# EAGLE board Schematic_Sensing_Module (EAGLE 9.6.2)
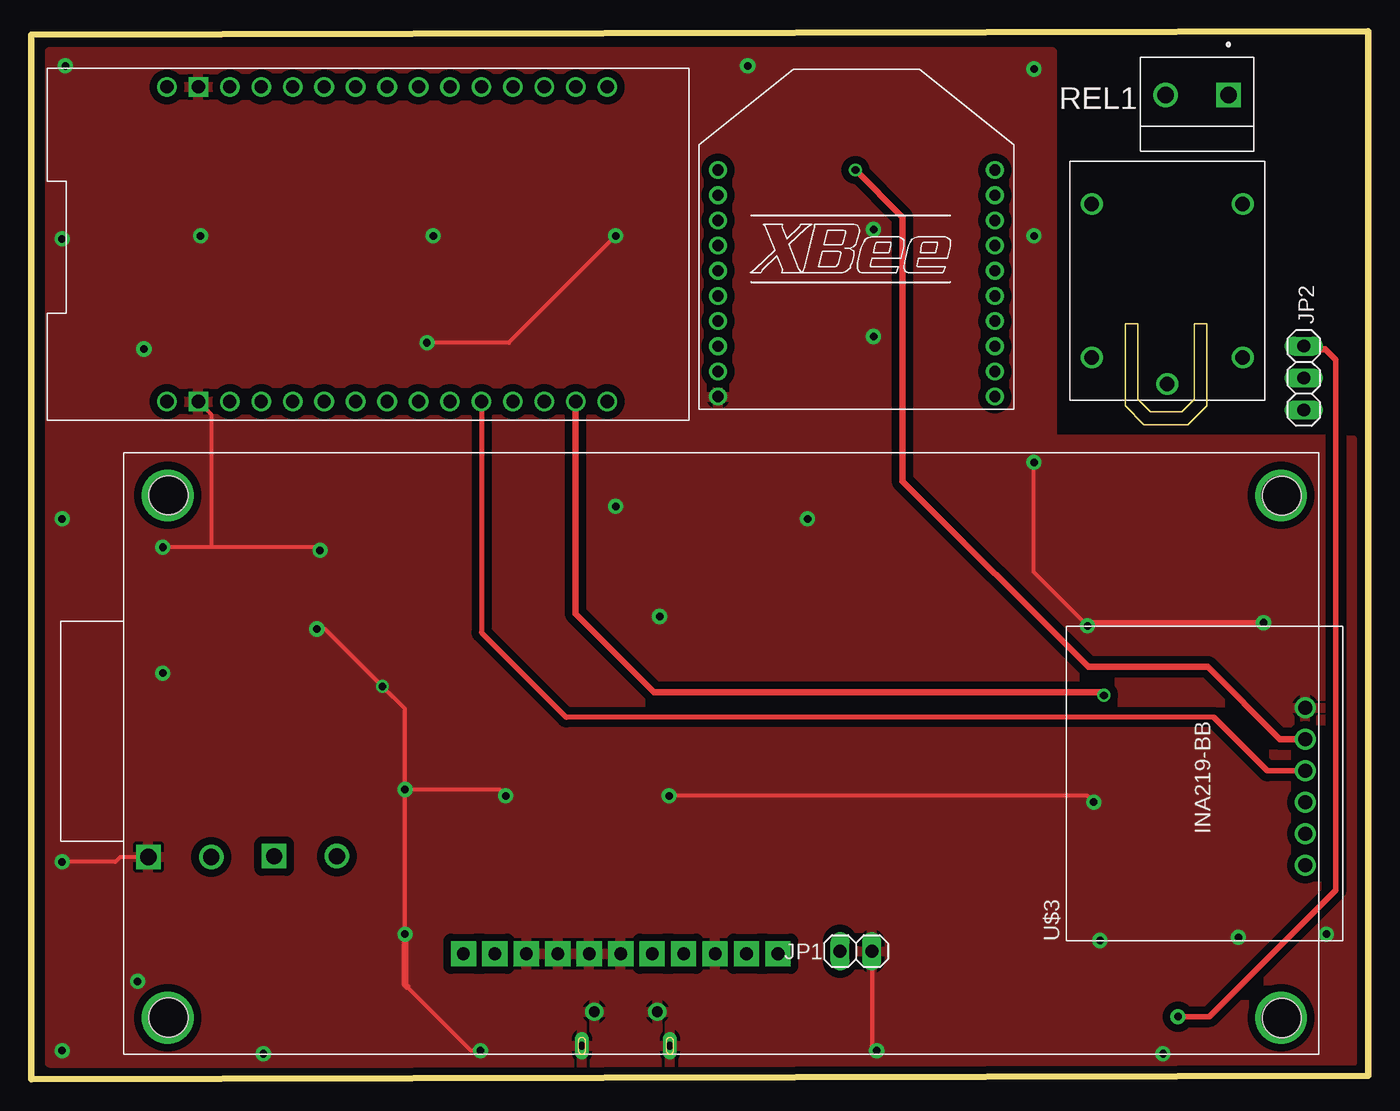
[diagram p0: board, top side]
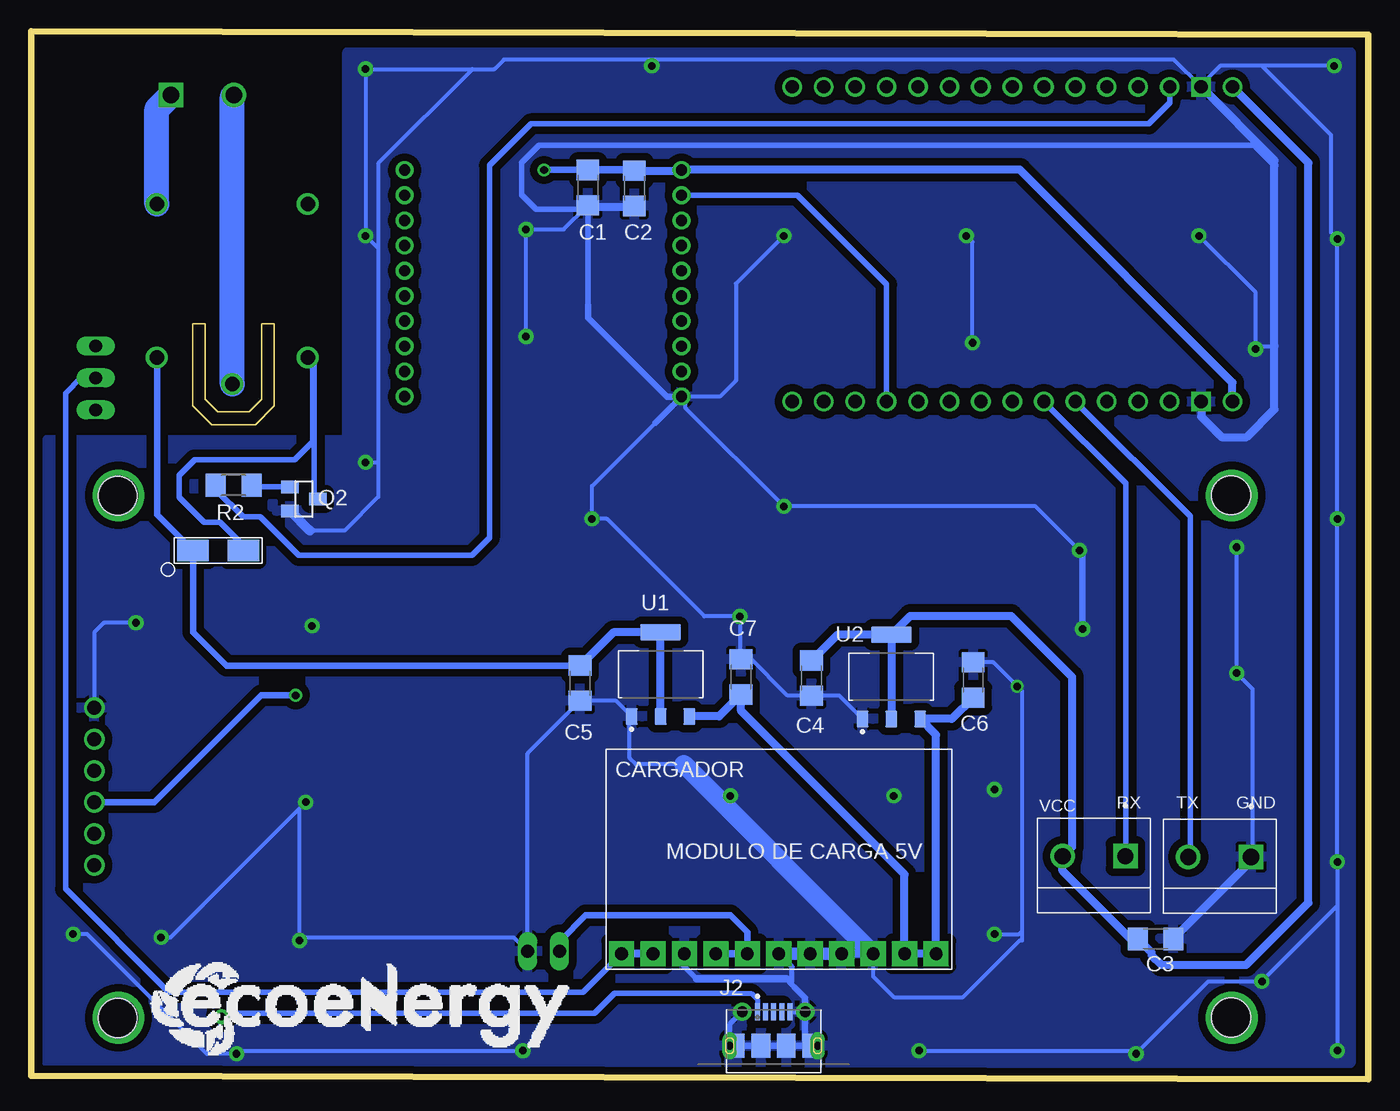
[diagram p1: board, bottom side, seen from below]

Size 106.25 x 83.25 mm. Coordinates in mm from the lower left corner, seen from the top.
Outline: 0,83 0,0 106.25,0.25 106.25,83.25 0,83
Copper layers (1*16): Top 0.035mm / dielectric 1.5mm / Bottom 0.035mm
Design rules "default *": minimum track width 0.3mm, minimum drill 0.6mm, track to track 0.6mm, track to pad 0.6mm, pad to pad 0.6mm, via to via 0.6mm, smd to smd 0.6mm, copper to edge 0.6mm, drill to drill 0.8mm, minimum pad ring 10mil, minimum via ring 8mil, stop-mask expansion 10mil, vias tented up to drill 0mil, thermal gap 10mil
Holes 3.1 mm at 10.9,46.4 10.9,4.9 99.4,4.85 99.4,46.35
Milling: 12 lines

## Footprints (pad centres in the part's own frame; a part is rotated, then mirrored left to right if it is on the bottom)
SMA = smd 2.5 x 1.7: 1 -2,0; 2 2,0
C1206 = smd 1.6 x 1.8: 1 -1.4,0; 2 1.4,0
MODULO_CARGA_5V = drill 1 pad 2 square: BAT -5,-7.5; BAT1 -2.5,-7.5; GND -7.5,-7.5; GND1 0,-7.5; GND2 2.5,-7.5; GND3 5,-7.5; GND4 7.5,-7.5; VIN -12.5,-7.5; VIN1 -10,-7.5; VOUT 10,-7.5; VOUT1 12.5,-7.5
TERMINAL-TB2 = drill 1.3 square: 1 -2.5,0 | drill 1.3: 2 2.5,0
MOLEX_1050170001 = smd 0.4 x 1.35: 1 -1.3,2.35; 2 -0.65,2.35; 3 0,2.35; 4 0.65,2.35; 5 1.3,2.35 | drill 0.85 pad 1.45: SH1 -2.5,2.35; SH2 2.5,2.35 | drill 0.6 pad 0.95 long: SH3 -3.5,-0.35; SH8 3.5,-0.35 | smd 1.2 x 1.9: SH4 -2.9,-0.35; SH7 2.9,-0.35 | smd 1.5 x 1.9: SH5 -1,-0.35; SH6 1,-0.35
1X02 = drill 1.016 long: 1 -1.27,0; 2 1.27,0
1X03 = drill 1.016 long: 1 -2.54,0; 2 0,0; 3 2.54,0
SOT23 = smd 1 x 1.4: 1 -0.95,-1.1; 2 0.95,-1.1; 3 0,1.1
R1206 = smd 1.6 x 1.803: 1 -1.422,0; 2 1.422,0
SOT229P700X180-4N = smd 0.93 x 1.31: 1 -2.29,-3.345; 2 0,-3.345; 3 2.29,-3.345 | smd 3.24 x 1.31: 4 0,3.345
DIP = drill 1.04: 3V3 12,-19; D2 12,-11.5; D4 12,-9; D5 12,-1.5; D12 -13,-11.5; D13 -13,-14; D14 -13,-9; D15 12,-14; D18 12,1; D19 12,3.5; D21 12,6; D22 12,13.5; D23 12,16; D25 -13,-1.5; D26 -13,-4; D27 -13,-6.5; D32 -13,3.5; D33 -13,1; D34 -13,8.5; D35 -13,6; EN -13,16; RX0 12,8.5; RX2 12,-6.5; TX0 12,11; TX2 12,-4; VIN -13,-19; VN -13,11; VP -13,13.5 | drill 1.04 square: GND 12,-16.5; GND1 -13,-16.5
NX4024T032 = drill 3.1: P$1 -44.5,21; P$2 -44.5,-20.5; P$3 44,21; P$4 44,-20.5
INA219-MODULE = drill 1.1: 1 -6.5,-8; 2 -4,-8; 3 -1.5,-8; 4 1,-8; 5 3.5,-8; 6 6,-8
SRD-N = drill 1.15: C 8.2,0; NC -6.1,-6; NO -6.1,6; VL+ 6.1,6; VL- 6.1,-6
XBEE-DIP = drill 0.9: 1 -11,9; 2 -11,7; 3 -11,5; 4 -11,3; 5 -11,1; 6 -11,-1; 7 -11,-3; 8 -11,-5; 9 -11,-7; 10 -11,-9; 11 11,-9; 12 11,-7; 13 11,-5; 14 11,-3; 15 11,-1; 16 11,1; 17 11,3; 18 11,5; 19 11,7; 20 11,9

## Placement (x,y rotation side)
1N4007  1N4007SMA  [SMA]  91.4,42 180 bottom
C1  100nF  [C1206]  62.01,70.84 270 bottom
C2  1u  [C1206]  58.32,70.78 90 bottom
C3  100nF  [C1206]  16.89,11.14 0 bottom
C4  [C1206]  44.24,31.86 270 bottom
C5  [C1206]  62.64,31.46 270 bottom
C6  [C1206]  31.39,31.71 90 bottom
C7  [C1206]  49.84,31.96 90 bottom
CARGADOR  MODULO_CARGA_5V  [MODULO_CARGA_5V]  46.84,17.46 0 bottom
CONN1  TERMINAL-TB2  [TERMINAL-TB2]  11.79,17.66 180 bottom
CONN2  TERMINAL-TB2  [TERMINAL-TB2]  21.79,17.71 180 bottom
J2  1050170001  [MOLEX_1050170001]  47.25,3 0 bottom
JP1  [1X02]  65.54,10.16 0 top
JP2  [1X03]  101.14,55.71 270 top
Q2  MMBT2222A  [SOT23]  84.59,46.1 270 bottom
R2  10k  [R1206]  90.18,47.19 0 bottom
REL1  TERMINAL-TB2  [TERMINAL-TB2]  92.65,78.21 180 top
U1  AMS1117-5.0  [SOT229P700X180-4N]  56.24,32.16 0 bottom
U2  AMS1117-5.0  [SOT229P700X180-4N]  37.89,31.96 0 bottom
U$1  ESP32-W  [DIP]  29.77,65.84 270 top
U$2  NX4024T032  [NX4024T032]  54.83,25.88 180 top
U$3  INABB  [INA219-MODULE]  93.25,23.5 90 top
U$5  SRD-3  [SRD-N]  90.29,63.43 270 top
U$9  XBEE-S2C  [XBEE-DIP]  65.58,63.23 0 top

## Library data of the parts
1N4007 = 1n400X
C1-C7 = rcl; SPICEPREFIX: C
CARGADOR = Modulo_Carga
CONN1 CONN2 REL1 = TERMINAL-TB001
J2 = 1050170001_MOLEX; AVAILABILITY: Warning; DESCRIPTION: USB - micro B USB 2.0 Receptacle Connector 5 Position Surface Mount, Right Angle; Through Hole; MF: Molex; MP: 1050170001; PACKAGE: None; PRICE: None; PURCHASE-URL: https://pricing.snapeda.com/search/part/1050170001/?ref=eda
JP1 JP2 = pinhead
Q2 = MMBT2222A; AVAILABILITY: Good; DESCRIPTION: Bipolar (BJT) Transistor NPN 40V 600mA 300MHz 225mW Surface Mount SOT-23; MF: ON Semiconductor; MP: MMBT2222A; PACKAGE: None; PRICE: None
R2 = rcl; SPICEPREFIX: R
U1 U2 = AMS1117-5.0; AVAILABILITY: Unavailable; DESCRIPTION: Sot223/Pkg 1-Amp 5-Volt Low Drop Out Voltage Regulatator; MF: Advanced Monolithic Systems; MP: AMS1117-5.0; PACKAGE: None; PRICE: None
U$1 = ESP32-W
U$2 = NEXTION
U$3 = INA219BB
U$5 = RELE-SRD
U$9 = XBEES2

## Nets
32K: U$3.1
CR1: REL1.2 U$5.C
DOUT: U$1.RX0 U$9.2
GND: C1.2 C2.1 C3.2 C4.2 C5.2 C6.2 C7.2 CARGADOR.GND CARGADOR.GND1 CARGADOR.GND2 CARGADOR.GND3 CARGADOR.GND4 CONN1.1 J2.5 J2.SH1 J2.SH2 J2.SH3 J2.SH4 J2.SH5 J2.SH6 J2.SH7 J2.SH8 JP1.2 Q2.2 U1.1 U2.1 U$1.GND U$1.GND1 U$3.6 U$9.10
N$5: Q2.1 R2.2
N$8: 1N4007.1 Q2.3 U$5.VL-
NOR1: REL1.1 U$5.NO
RXNEX: CONN2.1 U$1.TX2
SCL: U$1.D22 U$3.3
SDA: U$1.D21 U$3.4
SQW: U$3.2
TXNEX: CONN1.2 U$1.RX2
VBAT: CARGADOR.BAT CARGADOR.BAT1 JP1.1
VDEVICES: C3.1 C4.1 CONN2.2 U2.2 U2.4 U$1.VIN
VINCHAR: J2.1 JP2.1
VON: CARGADOR.VIN CARGADOR.VIN1 JP2.2
VOUTCH: C6.1 C7.1 CARGADOR.VOUT CARGADOR.VOUT1 U1.3 U2.3
VOUTRELAYS: 1N4007.2 C5.1 U1.2 U1.4 U$5.VL+
VR1: R2.1 U$1.D13
VXBEE: C1.1 C2.2 U$1.3V3 U$3.5 U$9.1

## Tracks (layer width: path | path; a pad name or v marks a point on that pad's centre or on a via)
CR1
  Bottom 2: U$5.C 90.29,78.07 REL1.2
DOUT
  Bottom 0.45: U$1.RX0 38.27,63.14 45.36,70.23 U$9.2
GND  (via drill 0.6, 0.6 pad 1.2)
  Top 0.3: U$1.GND 14.27,52.84 14.27,42.34 14.19,42.26 v10.44,42.26 22.69,42.26 v22.94,42.01 | v46.44,67.01 37.94,58.51 v31.44,58.51 | CONN1.1 7.09,17.66 6.69,17.26 v2.44,17.26 | v35.69,2.26 34.94,2.26 29.85,7.35 | v29.69,11.51 v29.69,23.01 | v29.69,23.01 37.19,23.01 v37.69,22.51 | v29.69,23.01 29.69,29.41 v27.89,31.21 23.34,35.76 v22.69,35.76 | v84.44,22.01 83.94,22.51 v50.69,22.51 | v67.19,2.26 66.81,2.64 JP1.2 | v83.94,36.01 83.73,36.23 79.69,40.26 v79.69,49.01
  Top 0.5: v97.94,36.26 97.91,36.23 83.73,36.23 | 29.85,7.35 29.69,7.51 v29.69,11.51
  Bottom 0.3: CARGADOR.GND 54.59,9.71 54.59,9.15 | 54.39,25.01 58.19,25.01 58.69,25.51 58.69,28.66 U1.1 59.78,30.06 C5.2 66.81,25.89 JP1.2 67.91,11.26 84.69,11.26 v84.94,11.01 84.94,21.51 v84.44,22.01 95.19,11.26 v95.94,11.26 | U2.1 42.03,30.46 C4.2 46.14,30.46 49.19,33.51 49.69,33.51 C7.2 49.94,33.46 v49.94,36.76 52.76,36.76 60.51,44.51 v61.69,44.51 61.69,47.12 56.66,52.16 | CARGADOR.GND4 39.34,8.16 37.69,6.51 32.19,6.51 27.7,11 27.5,11 27.5,11.75 | 56.75,81.01 15.44,81.01 U$1.GND1 13.27,79 11.76,80.51 8.44,80.51 | 56.75,81.01 68.69,81.01 69.44,80.26 71.19,80.26 | 78.69,66.01 78.69,72.76 71.19,80.26 | 78.69,66.01 v79.69,67.01 v79.69,80.26 71.19,80.26 | 78.69,66.01 78.69,49 | 78.69,49 78.69,46.26 81.37,43.59 84.13,43.59 | v67.19,2.26 89.69,2.26 v89.94,2.01 92.32,2.01 101.82,11.51 v102.94,11.51 | v35.69,2.26 18.69,2.26 v18.44,2.01 12.69,7.76 v8.44,7.76 2.44,13.76 v2.44,17.26 | v2.44,17.26 v2.44,2.26 | v2.44,17.26 v2.44,44.51 v2.44,66.76 2.94,67.26 2.94,75.01 8.44,80.51 | v2.69,80.51 8.44,80.51 | v13.44,67.01 8.94,62.51 v8.94,58.01 8.71,58.25 7.44,58.25 | v31.44,58.51 31.44,66.51 v31.94,67.01 | v46.44,67.01 50.25,63.2 50.25,55.5 51.52,54.23 54.25,54.23 | 54.25,54.23 U$9.10 | 54.25,54.23 54.25,53.32 v46.44,45.51 26.44,45.51 v22.94,42.01 | v66.94,59.01 v66.94,67.51 63.94,67.51 C1.2 | v56.94,80.51 56.75,80.7 56.75,81.01 | v10.44,42.26 v10.44,32.26 9.19,31.01 9.19,17.56 CONN1.1 | v79.69,49.01 78.7,49.01 78.69,49 | v97.94,36.26 100.49,36.26 101.25,35.5 U$3.6 | 27.5,11.75 27.5,30.82 v27.89,31.21 29.79,33.11 C6.2 | v29.69,11.51 27.74,11.51 27.5,11.75
  Bottom 0.4: 45.79,7.51 45.79,8.91 CARGADOR.GND1 | 53.4,7.96 54.59,9.15 | 45.54,7.26 45.79,7.51 | 45.79,7.51 46.24,7.96 | J2.5 45.1,5.35 44.75,5 | J2.SH1 50.75,4.35 J2.SH3
  Bottom 0.45: 62.01,61.5 62.01,69.11 | 62.01,69.11 C1.2 | 7.44,72.61 9.04,74.21 65.89,74.21 67.29,72.81 67.29,70.26 66.14,69.11 62.01,69.11
  Bottom 0.5: 56.66,52.16 U$9.10 55.73,54.23 62.01,60.51 62.01,61.5 | v22.69,35.76 22.69,41.76 v22.94,42.01 | J2.SH4 J2.SH5 J2.SH6 J2.SH7 44.75,3.05 44.75,5 J2.SH2 44.75,6.47 45.54,7.26
  Bottom 0.6: 46.24,7.96 53.4,7.96
  Bottom 0.65: CARGADOR.GND4 CARGADOR.GND3 | C3.2 9.29,17.34 CONN1.1 | C1.2 61.88,69.31 58.39,69.31 C2.1 | U$1.GND 13.27,52.64 11.64,51.01 9.64,51.01 7.44,53.21 7.44,58.25 7.44,72.61 7.44,73.01 U$1.GND1
  Bottom 0.8: 84.13,43.59 Q2.2
  Bottom 1: CARGADOR.GND3 CARGADOR.GND2 CARGADOR.GND1
  Bottom 1.5: CARGADOR.GND4 54.39,25.01
  pour Bottom (isolate 0.6): 81.14,81.61 1.39,81.61 1.39,1.26 104.99,1.26 104.99,50.81 81.14,50.81
  pour Top (isolate 0.6): 104.99,1.31 104.99,50.81 81.14,50.81 81.14,81.61 1.44,81.61 1.44,1.31
N$5
  Bottom 0.45: Q2.1 88.62,47.05 R2.2
N$8
  Bottom 0.45: Q2.3 83.79,46.4 83.79,56.83 U$5.VL- 83.89,56.93 83.89,50.66 85.34,49.21 93.29,49.21 94.5,48 94.5,46.25 92.5,44.25 91.25,44.25 89.4,42.4
  Bottom 0.5: 1N4007.1 89.4,42.4
NOR1
  Bottom 2: U$5.NO 96.29,77.07 REL1.1
RXNEX
  Bottom 0.45: U$1.TX2 19.27,47.34 19.27,17.73 CONN2.1
SCL  (via drill 0.6)
  Top 0.5: U$1.D22 43.27,36.98 49.5,30.75 85,30.75 v85.25,30.5
  Bottom 0.5: v85.25,30.5 88,30.5 96.5,22 U$3.3
SDA
  Top 0.4: U$1.D21 35.77,35.48 42.5,28.75 94,28.75
  Top 0.45: U$3.4 98.25,24.5 94,28.75
TXNEX
  Bottom 0.45: CONN1.2 14.14,17.81 14.14,44.71 U$1.RX2
VBAT
  Bottom 0.5: CARGADOR.BAT1 49.34,11.66 50.69,13.01 62.19,13.01 64.19,11.01 64.19,10.24
  Bottom 0.6: 64.19,10.24 JP1.1 | CARGADOR.BAT CARGADOR.BAT1
VDEVICES
  Bottom 0.65: U2.4 U2.2 | U2.4 42.2,35.31 C4.1 | U2.4 36.39,36.81 28.39,36.81 23.54,31.96 23.54,18.46 CONN2.2 24.29,16.54 18.89,11.14 C3.1 17.22,10.07 17.22,9.86 16.42,9.07 9.69,9.07 4.74,14.01 4.74,72.81 U$1.VIN
VINCHAR  (via drill 0.6 pad 1.2)
  Top 0.45: v91.14,4.96 93.64,4.96 103.69,15.01 103.69,57.16 102.85,58
  Top 0.5: 102.85,58 101.39,58 JP2.1
  Bottom 0.4: 50.44,6.81 49.01,6.81 48.55,6.35 J2.1
  Bottom 0.45: 50.44,6.81 59.89,6.81 61.49,5.21 90.89,5.21 v91.14,4.96
VON
  Bottom 0.45: CARGADOR.VIN 62.39,6.91 95.34,6.91 103.54,15.11 103.54,54.51 102.34,55.71 JP2.2
  Bottom 0.65: CARGADOR.VIN1 CARGADOR.VIN
VOUTCH
  Bottom 0.65: U1.3 51.59,28.82 C7.1 49.84,29.26 36.84,16.26 CARGADOR.VOUT CARGADOR.VOUT1 34.34,27.36 U2.3 33.09,28.62 C6.1
VOUTRELAYS
  Bottom 0.5: C5.1 90.75,32.86 93.4,35.52 1N4007.2 96.25,44.84 96.25,57.29 U$5.VL+
  Bottom 0.65: U1.2 U1.4 60,35.51 C5.1
VR1
  Bottom 0.3: R2.1 91.6,46.84
  Bottom 0.45: U$1.D13 15.77,77.58 17.44,75.91 66.54,75.91 69.84,72.61 69.84,43.01 71.24,41.61 85,41.61 88.06,44.67 89.44,44.67 91.6,46.84
VXBEE  (via drill 0.6)
  Top 0.5: v65.5,72.25 69.25,68.5 69.25,47.5 84,32.75 93.5,32.75 99.25,27 U$3.5
  Bottom 0.45: 58.38,72.24 C2.2
  Bottom 0.5: v65.5,72.25 v65.49,72.24 C1.1
  Bottom 0.6: C1.1 58.38,72.24
  Bottom 0.65: U$1.3V3 10.77,55.34 27.69,72.26 54.55,72.26 U$9.1 54.63,72.18 C2.2

## Text on the board
bPlace: VCC | GND | TX | RX